# Altium PCB Converter_PCB.PcbDoc
Units mm, origin at the board's own origin, x right, y up, seen from the top; angles counter-clockwise.
Board outline 40 x 15 mm, 2 copper layers (Top Layer, Bottom Layer), stack 1.671 mm thick; 13 components, 11 nets, 61 pads, 22 vias.
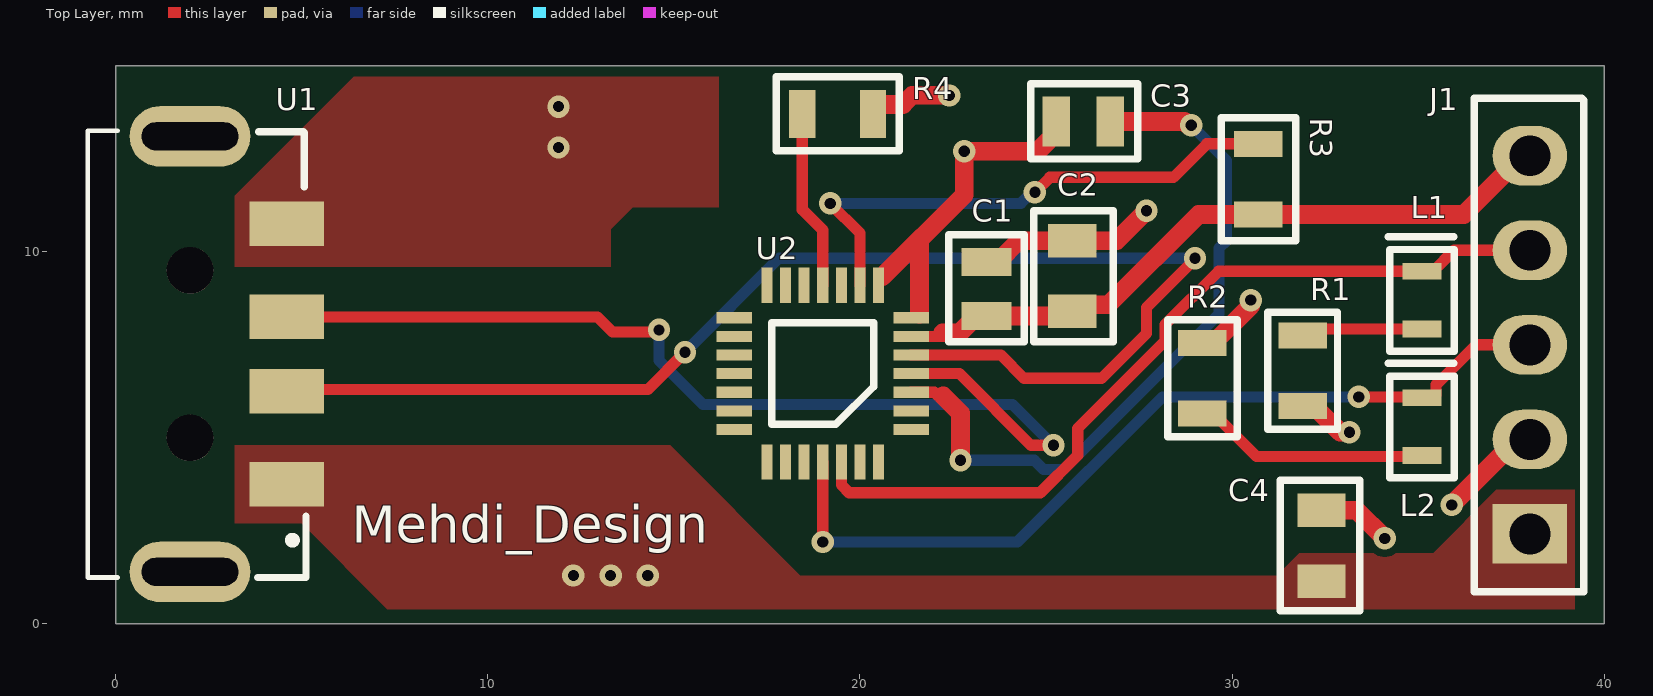
[diagram p0: Top Layer view]
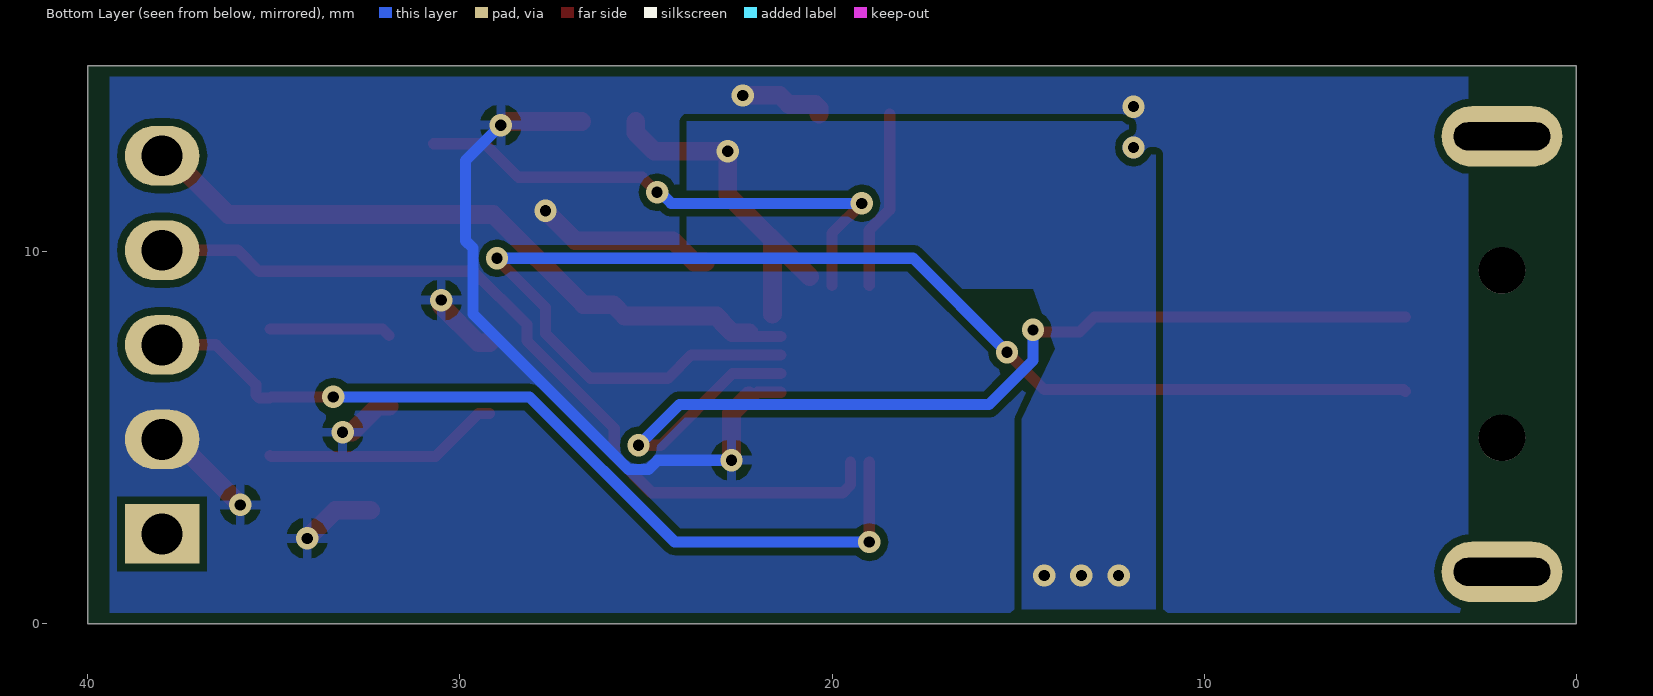
[diagram p1: Bottom Layer view, seen from below]
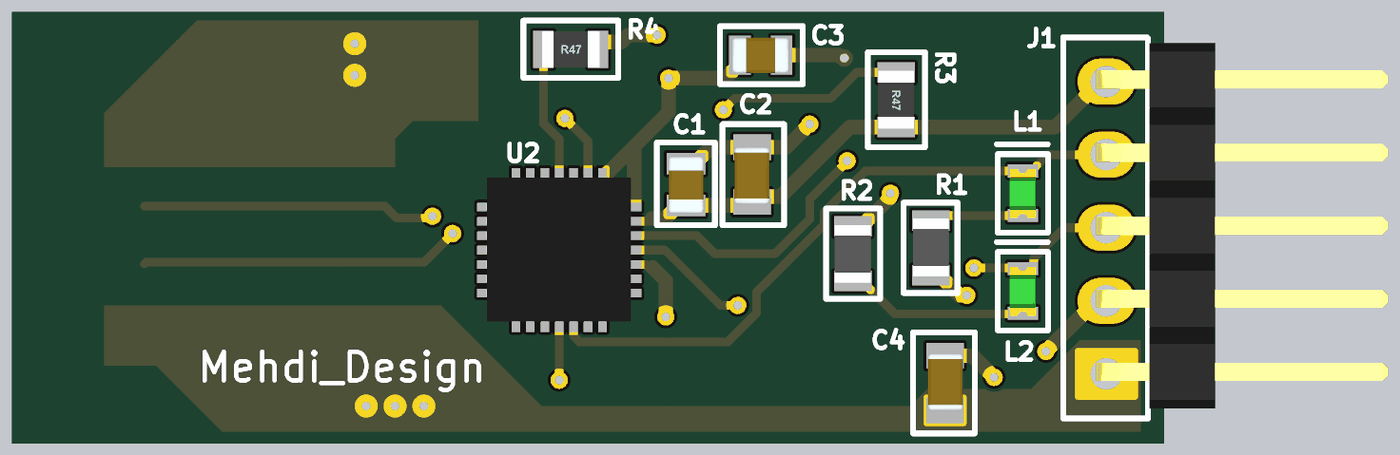
[diagram p2: 3D render of the assembled board from above, using the file's embedded part models]

## Layer stack, top to bottom
Top Solder: solder mask 0.0102, Solder Resist, Dk 3.5
Top Layer: signal copper 0.0356
Dielectric 1: dielectric 1.6, FR-4, Dk 4.8
Bottom Layer: signal copper 0.0356
Bottom Solder: solder mask 0.0102, Solder Resist, Dk 3.5

## Board outline
0,0 40,0 40,15 0,15

## Design rules (kind name [scope] priority, off if disabled: settings)
Clearance "around poly" [isregion] p1: gap=0.2 ignorepadtopadclearanceinfootprint=TRUE
Clearance [All] p2: gap=0.2 ignorepadtopadclearanceinfootprint=FALSE
ComponentClearance [All] p1: gap=0.2 collisioncheckmode=3 verticalgap=0.2 showdistances=FALSE
HoleSize [All] p1: absolutevalues=TRUE maxlimit=10 minlimit=0.2 maxpercent=80.000 minpercent=20.000
HoleToHoleClearance [All] p1: gap=0.3 allowstackedmicrovias=TRUE
MinimumSolderMaskSliver [All] p1: minsoldermaskwidth=0.07
PlaneConnect [All] p1: planeconnectstyle=Direct reliefexpansion=0.508 reliefentries=4 reliefconductorwidth=0.254 reliefairgap=0.254
PolygonConnect [All] p1: connectstyle=Direct reliefconductorwidth=0.254 reliefentries=4 polygonreliefangle="90 Angle" airgapwidth=0.254
RoutingVias [All] p1: holewidth=0.3 width=0.6 viastyle="Through Hole" minholewidth=0.3 minwidth=0.6 maxholewidth=0.3 maxwidth=0.6
SilkToSilkClearance [All] p1: silktosilkclearance=0.1
SilkToSolderMaskClearance [IsPad] p1: minsilkscreentomaskgap=0.1 clearancetoexposedcopper=TRUE
SolderMaskExpansion [All] p1: expansion=0.1 istentingtop=FALSE
Width Power_width_5V [InNet('+5V') and InNet('VCC')] p1: maxlimit=0.5 minlimit=0.3 preferedwidth=0.5
Width GND_Width [InNet('GND')] p2: maxlimit=0.5 minlimit=0.3 preferedwidth=0.5 substack1={3CF08773-108E-4384-98BB-B7CB3B0A5F0D} toplayer_{3cf08773-108e-4384-98bb-b7cb3b0a5f0d}_minwidth=0.254 toplayer_{3cf08773-108e-4384-98bb-b7cb3b0a5f0d}_maxwidth=0.254 toplayer_{3cf08773-108e-4384-98bb-b7cb3b0a5f0d}_prefwidth=0.254 bottomlayer_{3cf08773-108e-4384-98bb-b7cb3b0a5f0d}_minwidth=0.254 bottomlayer_{3cf08773-108e-4384-98bb-b7cb3b0a5f0d}_maxwidth=0.254 bottomlayer_{3cf08773-108e-4384-98bb-b7cb3b0a5f0d}_prefwidth=0.254
Width nets [All] p3 off: maxlimit=0.5 minlimit=0.3 preferedwidth=0.3
23 further rules are at their usual default settings.

## Components (designator, comment, footprint, x,y, rotation, side; value= is the part's Value field where it differs from the comment)
C1 "Cap_1uF" CAP_1UF_0805 23.4,9 r90 top
C2 "Cap_47uF_0805" CAP_47UF_0805 25.7,9.35 r90 top
C3 "Cap_1uF" CAP_1UF_0805 26,13.5 r0 top
C4 "Cap_47uF_0805" CAP_47UF_0805 32.4,2.1 r270 top
J1 "Header_5x1_2.54mm" HEADER_5 38,2.42 r180 top
L1 "LED" LED 35.1,8.7 r270 top
L2 "LED" LED 35.1,5.3 r270 top
R1 "300R resistor" RESISTOR_0805_300R 31.9,6.8 r270 top
R2 "300R resistor" RESISTOR_0805_300R 29.2,6.6 r90 top
R3 "5K resistor" RESISTOR_0805 30.7,11.95 r90 top
R4 "5K resistor" RESISTOR_0805 19.4,13.7 r180 top
U1 "USB 2.0" USB 1.667,21.548 r270 top
U2 "CP2102" CP2102 21.375,5.225 r180 top

## Footprints (in the part's own frame and the unit in brackets; to place one, negate y for a bottom-side part, rotate by r counter-clockwise, add the part's x,y. Pads: shape width x height; smd on the part's side, far side on the other; paste and mask are expansions set on the pad)
CAP_1UF_0805 [mm]
  rect 0.75x1.35 smd: 1(-0.725,0) 2(0.725,0)
  silkscreen extent -1.41,-1.01 1.46,1.01, body extent -1.01,-0.63 0.99,0.62, height 1.45
CAP_47UF_0805 [mm]
  rect 0.9x1.3 smd: 1(-0.95,0) 2(0.95,0)
  silkscreen extent -1.76,-1.11 1.75,1.03, body extent -1.04,-0.61 0.96,0.64, height 1.45
CP2102 [mm]
  rect 0.95x0.3 smd: 1(0,0) 2(0,-0.5) 3(0,-1) 4(0,-1.5) 5(0,-2) 6(0,-2.5) 7(0,-3) 15(4.75,-3) 16(4.75,-2.5) 17(4.75,-2) 18(4.75,-1.5) 19(4.75,-1) 20(4.75,-0.5) 21(4.75,0)
  rect 0.3x0.95 smd: 8(0.875,-3.875) 9(1.375,-3.875) 10(1.875,-3.875) 11(2.375,-3.875) 12(2.875,-3.875) 13(3.375,-3.875) 14(3.875,-3.875) 22(3.875,0.875) 23(3.375,0.875) 24(2.875,0.875) 25(2.375,0.875) 26(1.875,0.875) 27(1.375,0.875) 28(0.875,0.875)
  silkscreen extent 1.01,-2.86 3.74,-0.14, body extent -0.13,-4.02 4.89,1, height 0.75
HEADER_5 [mm]
  rect 2x1.6 hole 1.1: 1(0,0)
  oval 2x1.6 hole 1.1: 2(0,-2.54) 3(0,-5.08) 4(0,-7.62) 5(0,-10.16)
  silkscreen extent -1.45,-11.7 1.5,1.55, body extent -9.78,-11.5 0.35,1.2, height 2.5
LED [mm]
  rect 0.45x1.05 smd: 1(-0.775,0) 2(0.775,0)
  silkscreen extent -1.7,-0.9 1.37,0.87, body extent -0.84,-1.63 0.86,0.45, height 0.9
RESISTOR_0805 [mm]
  rect 0.7x1.3 smd: 1(-0.95,0) 2(0.95,0)
  silkscreen extent -1.65,-1 1.65,0.99, body extent -1,-0.62 1,0.62, height 0.53
RESISTOR_0805_300R [mm]
  rect 0.7x1.3 smd: 1(-0.95,0) 2(0.95,0)
  silkscreen extent -1.58,-0.94 1.57,0.93, body extent -1.02,-0.62 0.98,0.63, height 0.61
USB [mm]
  rect 1.2x2 smd: 1(17.798,2.933) 2(15.298,2.933) 3(13.298,2.933) 4(10.798,2.933)
  oval 1.625x3.25 hole 0.75 slot 2.6 at 90 deg: S1(8.448,0.333) S2(20.148,0.333)
  round 1.25 hole 1.25 unplated: ""(12.048,0.333) ""(16.548,0.333)
  silkscreen extent 8.3,-2.42 20.3,3.45, body extent 8.33,-17.45 20.37,3.5, height 2.11

## Part data
C1 C3: library part "CAP 1uF", "Cap 1uF", Supplier Part Number 1=311-1886-1-ND, Supplier 1=Digi-Key
C2 C4: "TDK   C2012X5R1A476M125AC   SMD Multilayer Ceramic Capacitor, C Series, 47 F,  20%, X5R, 10 V, 0805 [2012 Metric]", Capacitance=47uF, Case Code (Imperial)=0805, Case Code (Metric)=2012, Dielectric=X5R, Dielectric Material=Ceramic, Manufacturer=TDK, Manufacturer Part Number=C2012X5R1A476M125AC, Max Operating Temperature=85°C, Min Operating Temperature=-55°C, Package Quantity=1, Supplier Part Number 1=445-8239-1-ND, Tolerance=20%, Voltage=10V, Case/Package=0805, Category="Ceramic Capacitors", ComponentLink1Description=https://datasheet.ciiva.com/24216/c2012x5r1a476m125ac-264921-24216523.pdf?src-supplier=Mouser, ComponentLink1URL=https://datasheet.ciiva.com/24216/c2012x5r1a476m125ac-264921-24216523.pdf?src-supplier=Mouser, ComponentLink2Description=https://datasheet.ciiva.com/24191/c2012x5r1a476m125ac-24191773.pdf?src-supplier=Future+Electronics, ComponentLink2URL=https://datasheet.ciiva.com/24191/c2012x5r1a476m125ac-24191773.pdf?src-supplier=Future+Electronics, ComponentLink3Description=https://datasheet.ciiva.com/6259/tdkmlcccaprange-6259575.pdf?src-supplier=Digi-Key, ComponentLink3URL=https://datasheet.ciiva.com/6259/tdkmlcccaprange-6259575.pdf?src-supplier=Digi-Key, ComponentLink4Description=https://datasheet.ciiva.com/6259/tdkmlcccaprange-6259576.pdf?src-supplier=Digi-Key, ComponentLink4URL=https://datasheet.ciiva.com/6259/tdkmlcccaprange-6259576.pdf?src-supplier=Digi-Key, ComponentLink5Description=https://datasheet.ciiva.com/6259/tdkmlcccaprange-6259577.pdf?src-supplier=Digi-Key, ComponentLink5URL=https://datasheet.ciiva.com/6259/tdkmlcccaprange-6259577.pdf?src-supplier=Digi-Key, ComponentLink6Description=https://datasheet.ciiva.com/7975/1796654-7975085.pdf?src-supplier=Element14, ComponentLink6URL=https://datasheet.ciiva.com/7975/1796654-7975085.pdf?src-supplier=Element14, ComponentLink7Description=https://datasheet.ciiva.com/22694/1796654-22694142.pdf?src-supplier=Element14, ComponentLink7URL=https://datasheet.ciiva.com/22694/1796654-22694142.pdf?src-supplier=Element14, Composition=Ceramic, Depth=1.25mm, Height=1.25mm, Lead Free="Lead Free", Length=2mm, Mount="Surface Mount", Packaging="Tape and Reel", Pricing 1="1=0,93000, 10=0,70800, 50=0,58800, 100=0,50640, 500=0,39204, 1000=0,33759 (USD)", REACH SVHC="No SVHC", RoHS=Yes, Stock 1=56022, Supplier 1=Digi-Key, Termination=SMD/SMT, Thickness=0.057inch, Voltage Rating=10V, Voltage Rating (DC)=10V, Weight=0.000194oz, Width=0.049inch
J1: library part PH1RA-05-UA, "HEADER, 2.54MM, VERTICAL THOUGH HOLE, 5 POSITION; Product Range:HTSW Series; Contact Termination Type:Through Hole; Gender:Header; No. of Contacts:5; Pitch Spacing:2.54mm; Contact Plating:Tin Plated Contacts; No. of Rows:1 ;RoHS Compliant: Yes", Manufacturer="Adam Equipment", Supplier Part Number 1=2057-PH1RA-05-UA-ND, Category=Connectors, Lead Free="Lead Free", Manufacturer Part Number=PH1RA-05-UA, Pricing 1="1=0,16000, 10=0,15100, 100=0,10480, 500=0,08866, 1000=0,07254, 5000=0,06448, 10000=0,05844 (USD)", RoHS=No, Stock 1=3481, Supplier 1=Digi-Key
L1 L2: library part LTST-C171TBKT, "LED BLUE CLEAR CHIP SMD", Case Code (Imperial)=0805, Case Code (Metric)=2012, Color=Blue, Forward Current=20mA, Forward Voltage=3.8V, Lens Color=Colorless, Manufacturer="Vishay Lite-On", Max Operating Temperature=80°C, Min Operating Temperature=-20°C, Package Quantity=1, Power Dissipation=76mW, Reverse Voltage=5V, Supplier Part Number 1=160-1645-1-ND, Case/Package=0805, Category=LEDs, ComponentLink1Description=https://datasheet.ciiva.com/2110/ltst-c171tbkt-2110304.pdf?src-supplier=Digi-Key, ComponentLink1URL=https://datasheet.ciiva.com/2110/ltst-c171tbkt-2110304.pdf?src-supplier=Digi-Key, ComponentLink2Description=https://datasheet.ciiva.com/15118/getdatasheetpartid-225754-15118121.pdf?src-supplier=Verical, ComponentLink2URL=https://datasheet.ciiva.com/15118/getdatasheetpartid-225754-15118121.pdf?src-supplier=Verical, ComponentLink3Description=https://datasheet.ciiva.com/11774/0900766b80dc029b-11774836.pdf?src-supplier=RSComponents, ComponentLink3URL=https://datasheet.ciiva.com/11774/0900766b80dc029b-11774836.pdf?src-supplier=RSComponents, ComponentLink4Description=https://datasheet.ciiva.com/12403/lite-on-ltst-c171tbkt-187246-12403800.pdf?src-supplier=Mouser, ComponentLink4URL=https://datasheet.ciiva.com/12403/lite-on-ltst-c171tbkt-187246-12403800.pdf?src-supplier=Mouser, ComponentLink5Description=https://datasheet.ciiva.com/2110/s-110-ltst-c171tbkt0630-2110305.pdf?src-supplier=Digi-Key, ComponentLink5URL=https://datasheet.ciiva.com/2110/s-110-ltst-c171tbkt0630-2110305.pdf?src-supplier=Digi-Key, ComponentLink6Description=https://datasheet.ciiva.com/16444/lite-onltst-c171tbkt-16444780.pdf?src-supplier=Future+Electronics, ComponentLink6URL=https://datasheet.ciiva.com/16444/lite-onltst-c171tbkt-16444780.pdf?src-supplier=Future+Electronics, Depth=1.25mm, Dominant Wavelength=475nm, Height=0.8mm, Illumination Color=Blue, Lead Free="Lead Free", Length=2mm, Lens Style=Diffused,Colorless,Rectangular,Clear, Lens Transparency=Clear, Luminous Intensity=180mcd, Manufacturer Part Number=LTST-C171TBKT, Mount="Surface Mount", Number of Elements=1, Number of LEDs=1, Number of Pins=2, Packaging="Tape and Reel", Pricing 1="1=0,46000, 10=0,32800, 100=0,14560, 500=0,10192, 1000=0,08372 (USD)", Radiation Hardening=No, RoHS=Yes, Stock 1=7193, Supplier 1=Digi-Key, Test Current=20mA, Viewing Angle=130°, Wavelength=468nm, Width=1.25mm
R1 R2: library part RC0805JR-07300RL, "Res Thick Film 0805 300 Ohm 5% 1/8W 100ppm/C SMD Paper T/R", Case Code (Imperial)=0805, Case Code (Metric)=2012, Manufacturer=Yageo, Max Operating Temperature=155°C, Max Power Dissipation=125mW, Min Operating Temperature=-55°C, Package Quantity=1, Resistance=300R, Supplier Part Number 1=311-300ARCT-ND, Temperature Coefficient=100ppm/°C, Tolerance=5%, Voltage Rating=150V, Case/Package=0805, Category="Chip SMD Resistors", ComponentLink1Description=https://datasheet.ciiva.com/2456/pyu-r-int-thick-7-2456273.pdf?src-supplier=Digi-Key, ComponentLink1URL=https://datasheet.ciiva.com/2456/pyu-r-int-thick-7-2456273.pdf?src-supplier=Digi-Key, ComponentLink2Description=https://datasheet.ciiva.com/2456/pyu-r-int-thick-7-2456274.pdf?src-supplier=Digi-Key, ComponentLink2URL=https://datasheet.ciiva.com/2456/pyu-r-int-thick-7-2456274.pdf?src-supplier=Digi-Key, ComponentLink3Description=https://datasheet.ciiva.com/2456/pyu-r-int-thick-7-2456275.pdf?src-supplier=Digi-Key, ComponentLink3URL=https://datasheet.ciiva.com/2456/pyu-r-int-thick-7-2456275.pdf?src-supplier=Digi-Key, Composition="Thick Film", Contact Plating=Tin,Matte,Lead, Depth=1.25mm, Features="Moisture Resistant", Height=0.024inch, Lead Free="Lead Free", Length=2mm, Manufacturer Part Number=RC0805JR-07300RL, Military Standard=Not, Number of Terminations=2, Packaging="Tape and Reel", Power Rating=125mW, Pricing 1="1=0,10000, 10=0,03300, 100=0,01350, 1000=0,00607, 2500=0,00527 (USD)", Radiation Hardening=No, RoHS=Yes, Stock 1=560666, Supplier 1=Digi-Key, Termination=SMD/SMT, Voltage Rating (DC)=150V, Width=0.049inch
R3 R4: library part Resistor_5K, "RES SMD 5K OHM 0.05% 1/8W 0805", Case Code (Imperial)=0805, Case Code (Metric)=2012, Manufacturer="Vishay Dale", Manufacturer Part Number=TNPU08055K00AZEN00, Max Operating Temperature=125°C, Max Power Dissipation=125mW, Min Operating Temperature=-55°C, Resistance=5kR, Supplier Part Number 1=541-3303-1-ND, Temperature Coefficient=5ppm/°C, Tolerance=0.05%, Case/Package=0805, ComponentLink1Description=http://www.vishay.com/docs/28779/tnpue3.pdf?src-supplier=Digi-Key, ComponentLink1URL=http://www.vishay.com/docs/28779/tnpue3.pdf?src-supplier=Digi-Key, Composition="Thin Film", Features="Moisture Resistant,Automotive AEC-Q200,Anti-Sulfur", Number of Terminations=2, Packaging="Cut Tape", Pricing 1="1=2,97000, 10=2,63400, 100=2,01120 (USD)", RoHS=No, Stock 1=926, Supplier 1=Digi-Key
U1: "CONN PLUG USB A 4POS SMD R/A", Manufacturer=Molex, Manufacturer Part Number=0480372200, Max Operating Temperature=85°C, Max Voltage Rating (AC)=150V, Min Operating Temperature=-20°C, Package Quantity=450, Supplier Part Number 1=WM3983CT-ND, Category=Connectors, ComponentLink1Description=https://datasheet.ciiva.com/851/480372200-sd-851819.pdf?src-supplier=Digi-Key, ComponentLink1URL=https://datasheet.ciiva.com/851/480372200-sd-851819.pdf?src-supplier=Digi-Key, ComponentLink2Description=https://datasheet.ciiva.com/851/480372200-sd-851820.pdf?src-supplier=Digi-Key, ComponentLink2URL=https://datasheet.ciiva.com/851/480372200-sd-851820.pdf?src-supplier=Digi-Key, ComponentLink3Description=https://datasheet.ciiva.com/851/480372200-sd-851821.pdf?src-supplier=Digi-Key, ComponentLink3URL=https://datasheet.ciiva.com/851/480372200-sd-851821.pdf?src-supplier=Digi-Key, Connector Type=USB, Contact Plating=Tin,Gold, Depth=18.75mm, Features=Shielded, Housing Material=Nylon, Length=12mm, Mount="Surface Mount,Horizontal", Number of Contacts=4, Number of Ports=1, Number of Terminals=4, Orientation="Right Angle", Packaging="Tape and Reel", Pitch=2mm, Pricing 1="1=1,30000, 10=1,14400, 25=1,07720, 50=1,03220, 100=0,98740 (USD)", Radiation Hardening=No, RoHS=Yes, Stock 1=12899, Supplier 1=Digi-Key, Termination=Solder
U2: "CP2102 UART-USB converter Module", Supplier Part Number 1=336-5890-1-ND, Supplier 1=Digi-Key

## Via types
v1: diameter 0.6, hole 0.3, Top Layer to Bottom Layer, 21 vias
v2: diameter 0.6, hole 0.3, Top Layer to Bottom Layer, tented both sides, 1 vias

## Nets (pads, with @x,y where several pads share a name; then routed paths per layer and width w, separated by ;. In a path a pad name is that pad's centre, name@x,y a point inside that pad or via, vN(x,y) a via of type N, cw(c..) or ccw(c..) an arc to the next point about the centre after c; other vN are vias at no path point)
+5V: C3.1 C4.2 J1.1 U1.1 U2.7 U2.8 | length 9.1
  Top Layer w0.5: U2.8@20.6,9.325 22.8,11.525 v1(22.8,12.7) 24.775,12.7 25.275,13.2 C3.1 ; U2.7@21.6,8.325 21.6,10.2
  other v1: 12.3,1.3 13.3,1.3 14.3,1.3
GND: C1.2 C2.2 C3.2 C4.1 J1.2 R1.2 R2.2 R4.1 U1.4 U2.3 | length 34.8
  Top Layer w0.3: U2.3 21.995,6.225 22.095,6.125 22.236,6.125
  Top Layer w0.5: R4.1 20.35,13.855 20.45,13.955 21.155,13.955 21.4,14.2 v1(22.4,14.2) ; 22.236,6.125 22.7,5.661 v1(22.7,4.4) ; C1.2 23.7,9.725 24.275,10.3 C2.2 26.9,10.3 v1(27.7,11.1) ; C3.2 28.719,13.5 28.819,13.4 v2(28.9,13.4) ; R2.2 29.5,7.55 30.5,8.55 v1(30.5,8.7) ; R1.2 32.2,5.85 32.901,5.149 v1(33.15,5.15) ; C4.1 33.35,3.05 v1(34.1,2.3) ; v1(35.9,3.2) 37.66,4.96 J1.2
  Bottom Layer w0.3: v1(22.7,4.4) 24.681,4.4 24.931,4.15 25.469,4.15 29.65,8.331 29.65,10.095 29.85,10.295 29.85,12.45 v2(28.9,13.4)
  other v1: 11.9,12.8 11.9,13.9
NetJ1_3: J1.3 L2.1 U2.25 | length 23.5
  Top Layer w0.3: v1(19,2.2) U2.25 ; v1(33.4,6.1) 35.075,6.1 35.1,6.075 35.4,6.075 35.475,6.15 35.475,6.425 36.55,7.5 J1.3
  Bottom Layer w0.3: v1(19,2.2) 24.226,2.2 28.126,6.1 v1(33.4,6.1)
NetJ1_4: J1.4 L1.1 U2.26 | length 22.6
  Top Layer w0.3: U2.26 19.5,3.73 19.705,3.525 24.844,3.525 25.85,4.531 25.85,5.25 28.2,7.6 28.2,8.045 29.63,9.475 35.4,9.475 35.965,10.04 J1.4
NetL1_2: L1.2 R1.1 | length 3.3
  Top Layer w0.3: R1.1 32.075,7.925 L1.2
NetL2_2: L2.2 R2.1 | length 6.4
  Top Layer w0.3: R2.1 29.5,5.65 30.65,4.5 35.075,4.5 L2.2
NetR3_2: R3.2 U2.9 | length 14.7
  Top Layer w0.3: v1(19.2,11.3) 20,10.5 U2.9 ; v1(24.7,11.6) 25.1,12 28.419,12 29.319,12.9 R3.2
  Bottom Layer w0.3: v1(19.2,11.3) 24.319,11.3 24.619,11.6 v1(24.7,11.6)
NetR4_2: R4.2 U2.11 | length 4.8
  Top Layer w0.3: R4.2 18.45,11.131 19,10.581 U2.11
NetU1_2: U1.2 U2.5 | length 35.5
  Top Layer w0.3: U1.2 4.65,6.3 14.3,6.3 v1(15.3,7.3) ; U2.5 23.784,7.225 24.409,6.6 26.493,6.6 27.7,7.807 27.7,8.5 29,9.8 v1(29,9.826)
  Bottom Layer w0.3: v1(15.3,7.3) 17.826,9.826 v1(29,9.826)
NetU1_3: U1.3 U2.4 | length 27.2
  Top Layer w0.3: U1.3 12.95,8.25 13.357,7.843 14.543,7.843 v1(14.6,7.9) ; U2.4 22.675,6.725 24.6,4.8 v1(25.2,4.8)
  Bottom Layer w0.3: v1(14.6,7.9) 14.6,7.081 15.781,5.9 24.1,5.9 v1(25.2,4.8)
VCC: C1.1 C2.1 J1.5 R3.1 U2.6 | length 18.7
  Top Layer w0.3: U2.6 22.125,7.725 22.225,7.825
  Top Layer w0.5: 22.225,7.825 22.682,7.825 22.975,8.118 22.975,8.15 23.1,8.275 25.575,8.275 25.88,8.58 26.68,8.58 29.1,11 R3.1 36.22,11 37.8,12.58 J1.5
pads on no net: U1. U1.S1 U1.S2 U2.1 U2.2 U2.10 U2.12 U2.13 U2.14 U2.15 U2.16 U2.17 U2.18 U2.19 U2.20 U2.21 U2.22 U2.23 U2.24 U2.27 U2.28

## Polygon pours and split planes (outlines as drawn)
GND on Top Layer "GND_L01_P002" (solid, remove dead copper, pour order 2): 3.2,9.6 13.3,9.6 13.3,10.6 13.9,11.2 16.2,11.2 16.2,14.7 6.4,14.7 3.2,11.5
+5V on Top Layer "+5V_L01_P000" (solid, remove dead copper, pour order 0): 39.2,3.6 39.2,0.4 7.3,0.4 5,2.7 3.2,2.7 3.2,4.8 14.9,4.8 18.4,1.3 31.2,1.3 31.8,1.9 35.4,1.9 37.1,3.6
GND on Bottom Layer "GND_L02_P007" (solid, remove dead copper, pour order 7): 39.4,0.3 31.4,0.3 2.9,0.3 2.9,14.7 39.4,14.7
+5V on Bottom Layer "+5V_L02_P006" (solid, remove dead copper, pour order 6): 23.9,9 14.6,9 14,7.4 14.9,5.5 14.9,0.4 11.3,0.4 11.3,9 11.3,13.5 23.9,13.5

## Other copper
Bottom Layer:
  pour cut-out: 15.4,5.776

## Silkscreen, mask and mechanical layers (free items; w line width, h text height)
Top Overlay:
  text "Mehdi_Design" at 6.35,2.183 h1
Mechanical 2:
  text "L1" at 34.65,9.45 h1 r270

## Text inside footprints (layer, text, board x,y; h text height)
U1: Mechanical 13 "PCB EDGE" at -0.5,10.75 h1.02 r270